# Altium PCB PCB1.PcbDoc
Units mil, origin at the board's own origin, x right, y up, seen from the top; angles counter-clockwise.
Board outline 1095.03 x 730.03 mil, 2 copper layers (Top Layer, Bottom Layer); 11 components, 14 nets, 68 pads, 10 vias.
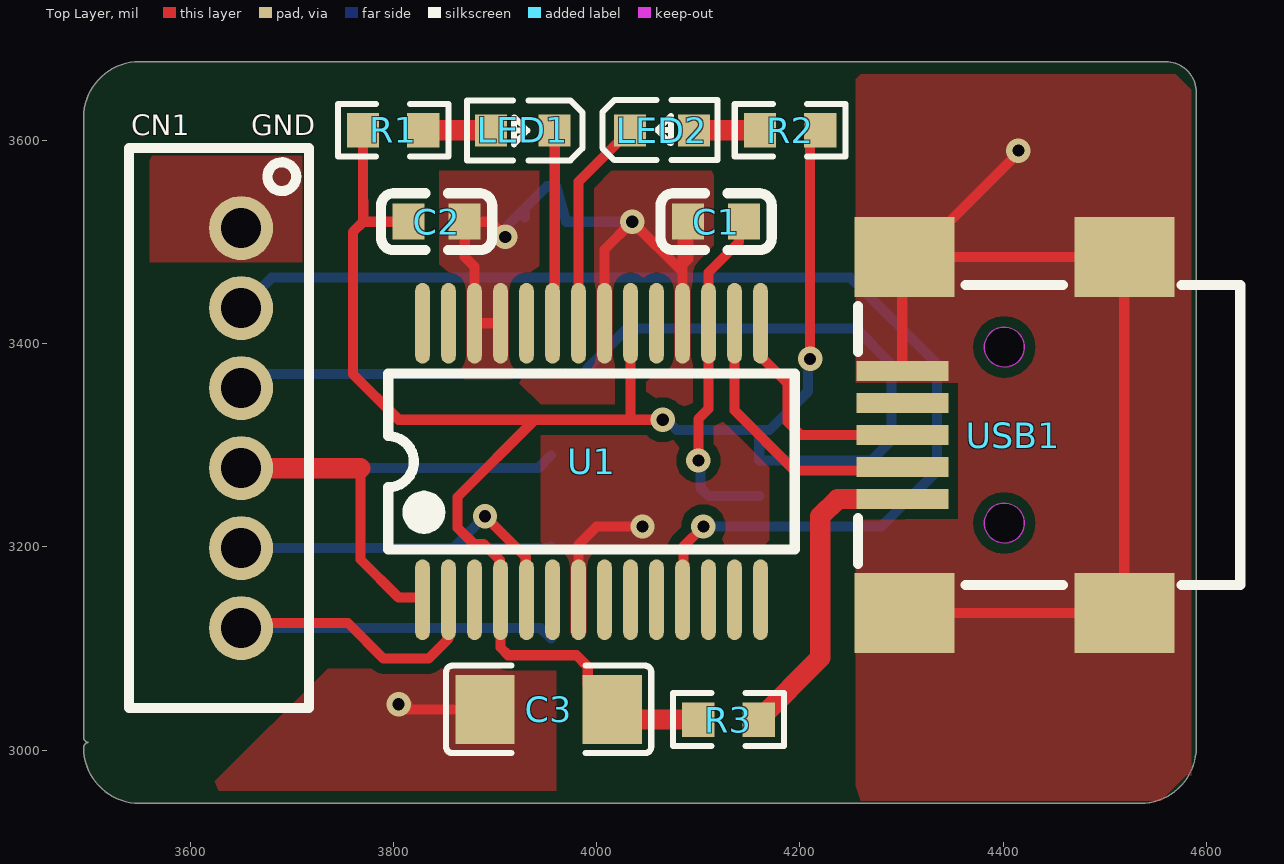
[diagram p0: Top Layer view]
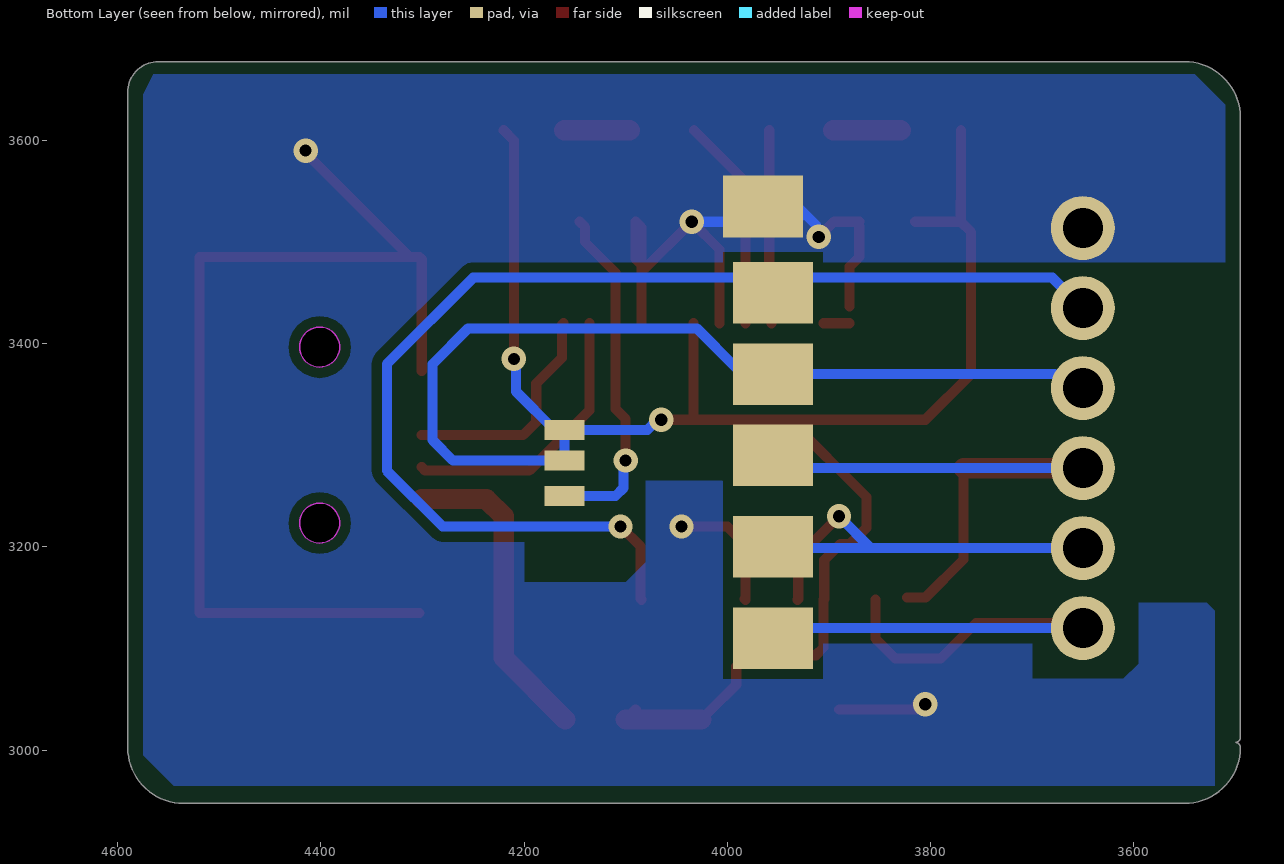
[diagram p1: Bottom Layer view, seen from below]
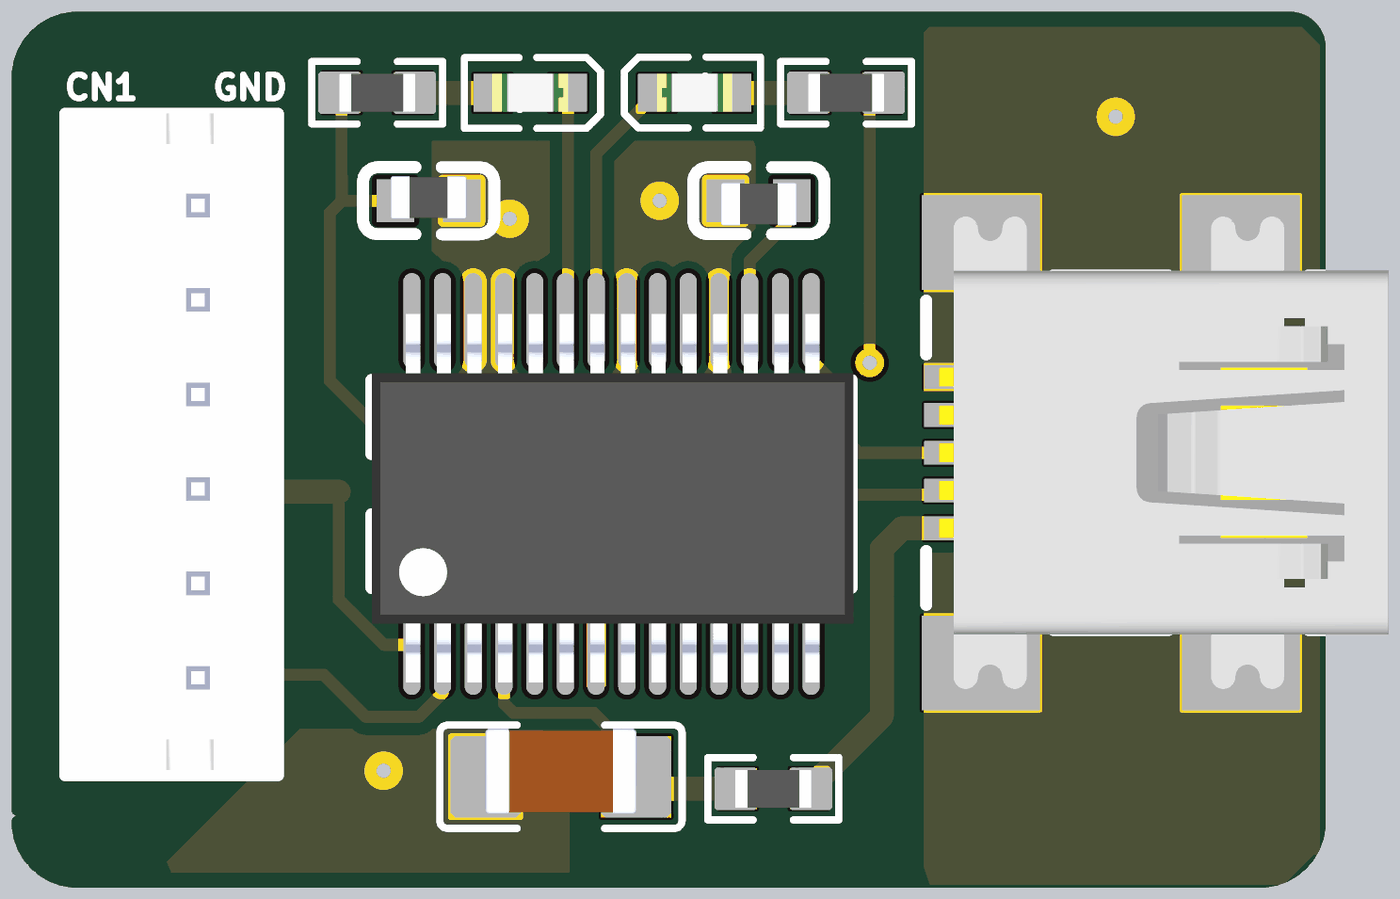
[diagram p2: 3D render of the assembled board from above, using the file's embedded part models]

## Layer stack, top to bottom
Top Solder: solder mask 0.4, Solder Resist, Dk 3.5
Top Layer: signal copper 1.4
Dielectric 1: dielectric 12.6, FR-4, Dk 4.8
Bottom Layer: signal copper 1.4
Bottom Solder: solder mask 0.4, Solder Resist, Dk 3.5

## Board outline
3494.99,3002.5 cw(c3500,3002.5) 3499.61,3007.5 cw(c3500,3012.5) 3494.99,3012.5 3494.99,3622.5 cw(c3550,3622.5) 3550,3677.51 4560,3677.51 cw(c4560,3647.5) 4590.02,3647.5 4590.02,3002.5 cw(c4535,3002.5) 4535,2947.49 3550,2947.49 cw(c3550,3002.5)

## Design rules (kind name [scope] priority, off if disabled: settings)
Clearance [All] p1: gap=10 ignorepadtopadclearanceinfootprint=FALSE
MinimumSolderMaskSliver [All] p1: minsoldermaskwidth=3.15
PolygonConnect [All] p1: connectstyle=Direct reliefconductorwidth=10 reliefentries=4 polygonreliefangle="90 Angle" airgapwidth=10
RoutingVias [All] p1: holewidth=12 width=24 viastyle="Through Hole" minholewidth=10 minwidth=10 maxholewidth=50 maxwidth=50
SilkToSilkClearance [All] p1: silktosilkclearance=3.94
SilkToSolderMaskClearance [IsPad] p1: minsilkscreentomaskgap=1.97 clearancetoexposedcopper=TRUE
SolderMaskExpansion [All] p1: expansion=4 istentingtop=FALSE
SupplyNets "Schematic Supply Nets_3" [InNet('+5V0')] p1: voltage=0.000
SupplyNets "Schematic Supply Nets_2" [InNet('GND')] p2: voltage=0.000
SupplyNets "Schematic Supply Nets" [InNet('+3V3')] p3: voltage=0.000
Width [All] p1: maxlimit=39.37 minlimit=10 preferedwidth=10
27 further rules are at their usual default settings.

## Components (designator, comment, footprint, x,y, rotation, side; value= is the part's Value field where it differs from the comment)
C1 "100nF" C0603 4117.56,3520 r0 top
C2 "100nF" C0603 3842.44,3520 r180 top
C3 "10uF" C1206 3952.7,3040 r0 top
CN1 "B6B-PH-K-S(LF)(SN)" CONN-TH_B6B-PH-K-S 3650,3316.85 r90 top
LED1 "19-217/R6C-AL1M2VY/3T" LED0603-RD 3927.16,3610.01 r180 top
LED2 "19-217/R6C-AL1M2VY/3T" LED0603-RD 4064.2,3609.99 r0 top
R1 "1kΩ" R0603 3799.66,3610 r180 top
R2 "1kΩ" R0603 4190.34,3610 r0 top
R3 "0" R0603 4129.66,3030 r0 top value=1kΩ
U1 "FT232RL-REEL" SSOP-28_L10.2-W5.3-P0.65-LS7.8-BL 3994.84,3283.97 r0 top
USB1 "KH-MINI-SMT-5P-Cu" MINI-USB-SMD_KH-MINI-SMT-5P-CU 4410,3310 r90 top

## Footprints (in the part's own frame and the unit in brackets; to place one, negate y for a bottom-side part, rotate by r counter-clockwise, add the part's x,y. Pads: shape width x height; smd on the part's side, far side on the other; paste and mask are expansions set on the pad)
C0603 [mm]
  rect 0.8x0.9 smd: 1(-0.7,0) 2(0.7,0)
  silkscreen extent -1.39,-0.71 1.39,0.71, body extent -0.8,-0.52 0.8,0.38, height 0.81
C1206 [mm]
  rect 1.485x1.728 smd paste-100 mask+0.051: 1(-1.593,0) 2(1.593,0)
  silkscreen extent -2.56,-1.09 2.56,1.09, body extent -1.6,-0.78 1.6,1.02, height 1.64
CONN-TH_B6B-PH-K-S [mm]
  round 1.6 hole 1: 1(5,0) 2(3,0) 3(1,0) 4(-1,0) 5(-3,0) 6(-5,0)
  silkscreen extent -7,-1.7 7,2.8, body extent -6.89,-1.71 7.01,2.79, height 6
LED0603-RD [mm]
  rect 0.8x0.8 smd paste+0 mask+0.051: 1(-0.799,0) 2(0.799,0)
  silkscreen extent -1.49,-0.75 1.39,0.76, body extent -0.8,-0.4 0.8,0.4, height 0.5
MINI-USB-SMD_KH-MINI-SMT-5P-CU [mm]
  rect 0.5x2.3 smd paste+0 mask+0.05: 1(-1.6,2.775) 2(-0.8,2.775) 3(0,2.775) 4(0.8,2.775) 5(1.6,2.775)
  rect 2x2.5 smd paste+0 mask+0.05: 6(-4.45,-2.775) 7(-4.45,2.725) 8(4.45,-2.775) 9(4.45,2.725)
  Keep-Out Layer board cut-out: 2.7,0.225 2.65,0.008 2.512,-0.166 2.311,-0.263 2.089,-0.263 1.888,-0.166 1.749,0.008 1.7,0.225 1.7,0.225 1.749,0.442 1.888,0.616 2.089,0.712 2.311,0.712 2.512,0.616 2.65,0.442 2.7,0.225
  Keep-Out Layer board cut-out: -1.7,0.225 -1.749,0.008 -1.888,-0.166 -2.089,-0.263 -2.311,-0.263 -2.512,-0.166 -2.65,0.008 -2.7,0.225 -2.7,0.225 -2.65,0.442 -2.512,0.616 -2.311,0.712 -2.089,0.712 -1.888,0.616 -1.749,0.442 -1.7,0.225
  Keep-Out Layer circle w0.025: c2.2,0.225 r0.5
  Keep-Out Layer circle w0.025: c-2.2,0.225 r0.5
  Keep-Out Layer region: 2.7,0.225 2.65,0.008 2.512,-0.166 2.311,-0.263 2.089,-0.263 1.888,-0.166 1.749,0.008 1.7,0.225 1.7,0.225 1.749,0.442 1.888,0.616 2.089,0.712 2.311,0.712 2.512,0.616 2.65,0.442 2.7,0.225
  Keep-Out Layer region: -1.7,0.225 -1.749,0.008 -1.888,-0.166 -2.089,-0.263 -2.311,-0.263 -2.512,-0.166 -2.65,0.008 -2.7,0.225 -2.7,0.225 -2.65,0.442 -2.512,0.616 -2.311,0.712 -2.089,0.712 -1.888,0.616 -1.749,0.442 -1.7,0.225
  silkscreen extent -3.75,-5.67 3.75,3.89, body extent -5,-5.89 5,3.61, height 3.9
R0603 [mil]
  rect 31.75x34.02 smd paste-3937.01 mask+2: 1(-29.66,0) 2(29.66,0)
  silkscreen extent -55,-26 55,26, body extent -31,-16 31,16, height 22
SSOP-28_L10.2-W5.3-P0.65-LS7.8-BL [mil]
  oval 14.33x79.35 smd: 1(-166.34,-136.03) 2(-140.75,-136.03) 3(-115.16,-136.03) 4(-89.57,-136.03) 5(-63.98,-136.03) 6(-38.39,-136.03) 7(-12.79,-136.03) 8(12.8,-136.03) 9(38.39,-136.03) 10(63.98,-136.03) 11(89.57,-136.03) 12(115.16,-136.03) 13(140.75,-136.03) 14(166.34,-136.03) 15(166.34,136.03) 16(140.75,136.03) 17(115.16,136.03) 18(89.57,136.03) 19(63.98,136.03) 20(38.39,136.03) 21(12.8,136.03) 22(-12.79,136.03) 23(-38.39,136.03) 24(-63.98,136.03) 25(-89.57,136.03) 26(-115.16,136.03) 27(-140.75,136.03) 28(-166.34,136.03)
  silkscreen extent -200,-87 200,87, body extent -200,-166 202,142, height 79

## Part data
C1 C2: library part CC0603KRX7R9BB104, JLCPCB Part Class="Basic Part", LCSC Part Name="100nF ±10% 50V", Manufacturer=YAGEO(国巨), Tolerance=±10%, Add into BOM=yes, Convert to PCB=yes, Datasheet=https://atta.szlcsc.com/upload/public/pdf/source/20180910/C282072_33301C7F631E79921B82A8DAC6BCC5B3.pdf, Device=CC0603KRX7R9BB104, Manufacturer Part=CC0603KRX7R9BB104, Supplier=LCSC, Supplier Footprint=0603, Supplier Part=C14663, Symbol=CC0603KRX7R9BB104
C3: library part CL31A106KBHNNNE, JLCPCB Part Class="Basic Part", LCSC Part Name="10uF ±10% 50V", Manufacturer=SAMSUNG(三星), Tolerance=±10%, Add into BOM=yes, Convert to PCB=yes, Datasheet=https://atta.szlcsc.com/upload/public/pdf/source/20160218/1457707763339.pdf, Device=CL31A106KBHNNNE, Manufacturer Part=CL31A106KBHNNNE, Supplier=LCSC, Supplier Footprint=1206, Supplier Part=C13585, Symbol=CL31A106KBHNNNE
CN1: library part B6B-PH-K-S(LF)(SN)_C131342, Colour=White, Current Rating (Max)=2A, Flame Retardant Rating=UL94V-0, JLCPCB Part Class="Extended Part", LCSC Part Name="1x6P 间距:2mm 直插 系列:PH", Manufacturer=JST, Operating Temperature Range=-25℃~+85℃, Rated Voltage (Max)=100V, Add into BOM=yes, Contact Material=Brass, Contact Plating=Tin, Convert to PCB=yes, Datasheet=https://atta.szlcsc.com/upload/public/pdf/source/20171026/C131342_15089839687311058815.pdf, Device=B6B-PH-K-S(LF)(SN)_C131342, Manufacturer Part=B6B-PH-K-S(LF)(SN), Mounting Style=Straight, Number of Pins=6P, Number of PINs Per Row=6, Number of Rows=1, Pins Structure=1x6P, Pitch=2mm, Plastic Material=PA66, Reference Series=PH, Row Spacing=-, Supplementary Features=打K脚, Supplier=LCSC, Supplier Footprint=插件,P=2mm, Supplier Part=C131342, Symbol=B6B-PH-K-S(LF)(SN), X-Length of Bottom Edge on Board (Spacing Line)=13.9mm, Y-Width of Bottom Edge on Board=4.5mm, Z-Height of the Board=6mm
LED1 LED2: Color Temperature=-, Emitted Color=Red, Forward Current=5mA, Forward Voltage (VF)=1.95V, JLCPCB Part Class="Extended Part", LCSC Part Name="红灯 停产 停产", Lens Color="Colorless Transparent Lens", Manufacturer=EVERLIGHT(亿光), Operating Temperature=-40℃~+85℃, Power Dissipation=60mW, Add into BOM=yes, Convert to PCB=yes, Datasheet=https://atta.szlcsc.com/upload/public/pdf/source/20160507/1462613613821.pdf, Device=19-217/R6C-AL1M2VY/3T, Diode Configuration=-, Dominant Wavelength=617.5nm, Manufacturer Part=19-217/R6C-AL1M2VY/3T, Mounting Sytle=-, Peak Wavelength=632nm, Supplier=LCSC, Supplier Footprint=0603, Supplier Part=C72044, Symbol=19-217/R6C-AL1M2VY/3T, Viewing Angle=120°
R1 R2 R3: library part RC0603FR-071KL, JLCPCB Part Class="Extended Part", LCSC Part Name="厚膜电阻 1kΩ ±1% 100mW", Manufacturer=YAGEO(国巨), Operating Temperature=-55℃~+155℃, Power(Watts)=100mW, Temperature Coefficient=±100ppm/℃, Tolerance=±1%, Voltage-Supply(Max)=75V, Add into BOM=yes, Convert to PCB=yes, Datasheet=https://atta.szlcsc.com/upload/public/pdf/source/20180316/70C0E2BDAE7FCC62C531A5A58D202EE1.pdf, Device=RC0603FR-071KL, Manufacturer Part=RC0603FR-071KL, Supplier=LCSC, Supplier Footprint=0603, Supplier Part=C22548, Symbol=RC0603FR-071KL, Type="Thick Film Resistors"
U1: JLCPCB Part Class="Extended Part", LCSC Part Name="FT232R USB UART 芯片", Manufacturer=FTDI(飞特帝亚), Operating Temperature=-40℃~+85℃, Supply Voltage=3.3V~5.25V, Add into BOM=yes, Applications Function="USB to UART", Convert to PCB=yes, Datasheet=https://atta.szlcsc.com/upload/public/pdf/source/20130221/1457706592200.pdf, Device=FT232RL-REEL, Manufacturer Part=FT232RL-REEL, Supplier=LCSC, Supplier Footprint=SSOP-28-208mil, Supplier Part=C8690, Symbol=FT232RL-REEL
USB1: Current Rating - Power (Max)=1A, JLCPCB Part Class="Extended Part", LCSC Part Name="Mini-B 母 卧贴", Manufacturer=kinghelm(金航标), Operating Temperature Range=-, Add into BOM=yes, Connector Type=Mini-B, Contact Material=-, Contact Plating=-, Convert to PCB=yes, Datasheet=https://atta.szlcsc.com/upload/public/pdf/source/20210202/C2688795_BF0BB16DAD2ABFC9845DEEA6AC1A1F9C.pdf, Device=KH-MINI-SMT-5P-Cu, Gender=Female, Manufacturer Part=KH-MINI-SMT-5P-Cu, Mounting Style=卧贴, Number of Contacts=5P, Number of Ports=1, Soldering Temperature(Max)=-, Standard="USB 2.0", Supplier=LCSC, Supplier Footprint=SMD, Supplier Part=C2688795, Symbol=KH-MINI-SMT-5P-CU

## Free pads (board coordinates)
  rect 78.74x60.63 smd far side paste-99999 mask+2: 3(3955,3110) 3(3955,3200) 3(3955,3290) 3(3955,3370) 3(3955,3450) 3(3965,3535)
  rect 39.37x19.68 smd far side paste-3937.01 mask+2: 3(4160,3250) 3(4160,3285) 3(4160,3315)

## Via types
v1: diameter 24.02, hole 12.01, Top Layer to Bottom Layer, 10 vias

## Nets (pads, with @x,y where several pads share a name; then routed paths per layer and width w, separated by ;. In a path a pad name is that pad's centre, name@x,y a point inside that pad or via, vN(x,y) a via of type N, cw(c..) or ccw(c..) an arc to the next point about the centre after c; other vN are vias at no path point)
+3V3: C1.2 pad.3@4160,3250 U1.17 | length 342.8
  Top Layer w10: v1(4100,3285) 4100,3325.82 4110,3335.82 U1.17 4110,3470 4140,3500 4140,3514.88 C1.2
  Bottom Layer w10: v1(4100,3285) 4102.01,3282.99 4102.01,3257.99 4110,3250 pad.3@4160,3250
+5V0: C2.2 C3.2 CN1.3 pad.3@3955,3370 pad.3@4160,3285 pad.3@4160,3315 R1.2 R2.2 R3.1 U1.4 U1.20 | length 2545.2
  Top Layer w10: R1.2 3770,3540.37 3770.09,3540.28 3770.09,3520.09 ; C2.2 3770.18,3520 3770.09,3520.09 ; C3.2@4025.4,3030 C3.2 3991.17,3064.23 3991.17,3082.1 3980,3093.26 3912.86,3093.26 3905.27,3100.86 U1.4 3904.44,3148.77 3904.44,3187.03 3888.55,3202.92 3878.88,3202.92 3862.99,3218.81 3862.99,3249.01 3938.99,3325 ; U1.20 4033.23,3328.23 4030,3325 ; v1(4065,3325) 4030,3325 ; R3.1@4090,3040 R3.1 ; v1(4210,3385) 4210,3600 R2.2 ; 3770.09,3520.09 3760,3510 3760,3370 3805,3325 3938.99,3325 ; 3938.99,3325 4030,3325
  Top Layer w20: C3.2@4025.4,3030 R3.1
  Bottom Layer w10: CN1.3 3664.34,3356.22 3678.12,3370 pad.3@3955,3370 ; pad.3@3990.86,3375.86 4030,3415 4255,3415 4290,3380 4290,3305 4270,3285 4160,3285 pad.3@4160,3315 ; v1(4065,3325) 4068.79,3325 4078.79,3315 pad.3@4160,3315 ; v1(4210,3385) 4207.99,3382.99 4207.99,3352.99 4170,3315 pad.3@4160,3315
CTS: CN1.2 pad.3@3955,3450 U1.11 | length 1171
  Top Layer w10: U1.11 4085.24,3148.77 4085.24,3200.24 v1(4105,3220)
  Bottom Layer w10: CN1.2 3680.04,3465 4250,3465 4335,3380 4335,3275 4280,3220 v1(4105,3220)
DTR: CN1.6 pad.3@3955,3110 U1.2 | length 576.2
  Top Layer w10: CN1.6 3655,3125 3755.14,3125 3790.14,3090 3834.42,3090 3854.09,3109.67 U1.2
  Bottom Layer w10: CN1.6 3945,3120 pad.3@3955,3110
GND: C1.1 C2.1 C3.1 CN1.1 pad.3@3965,3535 U1.7 U1.18 U1.21 U1.25 U1.26 USB1.5 USB1.6 USB1.7 USB1.8 USB1.9 | length 1931.1
  Top Layer w10: v1@3813.79,3045 v1(3805,3045) 3808.79,3045 3813.79,3040 C3.1 ; C2.1@3870,3515.74 3870,3485.32 3879.68,3475.64 U1.26@3879.68,3436.84 ; C2.1 3895,3520 v1(3910,3505) ; U1.26 U1.25 ; U1.7@3982.88,3148.77 U1.7 3982.05,3202.05 4000,3220 v1(4045,3220) ; U1.21 4007.64,3492.64 v1(4035,3520) 4084.41,3470.59 ; U1.18 4084.41,3514.41 C1.1 4090,3483.28 4084.41,3477.69 ; USB1.5 4300.74,3483.23 USB1.9 USB1.9@4312.56,3485.2 ; USB1.7 USB1.6 USB1.8 USB1.9@4312.56,3485.2 ; v1(4415,3590) 4415,3587.64 USB1.9@4312.56,3485.2
  Bottom Layer w10: v1(3910,3505) 3912.68,3507.68 3912.68,3516.74 3950.94,3555 3960,3555 3970,3520 v1(4035,3520) ; pad.3@3929.1,3524.1 pad.3@3929.1,3529.68
NetLED1_2: LED1.2 R1.1 | length 66.4
  Top Layer w20: R1.1 LED1.2
NetLED2_2: LED2.2 R2.1 | length 65
  Top Layer w20: LED2.2 R2.1
NetR3_2: R3.2 USB1.1 | length 312.9
  Top Layer w20: R3.2 4220,3090.68 4220,3230 4237.01,3247.01 USB1.1
RXD: CN1.5 pad.3@3955,3200 U1.5 | length 448.7
  Top Layer w10: v1(3890,3230) 3930.03,3189.97 3930.03,3148.77 U1.5
  Bottom Layer w10: CN1.5 3858.74,3198.74 ; v1(3890,3230) 3858.74,3198.74 ; pad.3@3955,3200 3953.74,3198.74 3858.74,3198.74
RXLED: LED2.1 U1.22 | length 211
  Top Layer w10: U1.22 3982.05,3559.31 LED2.1
TXD: CN1.4 pad.3@3955,3290 U1.1 | length 588.6
  Top Layer w10: 3767.52,3277.48 3767.52,3187.48 3805,3150 U1.1@3822.91,3150
  Top Layer w20: CN1.4 3767.52,3277.48
  Bottom Layer w10: CN1.4 3942.48,3277.48 pad.3@3955,3290
TXLED: LED1.1 U1.23 | length 190.9
  Top Layer w10: U1.23 3956.45,3453.68 3958.63,3455.86 LED1.1
USBDM: U1.16 USB1.2 | length 276.8
  Top Layer w10: U1.16 4135.59,3334.41 4195,3275 4297.24,3275 USB1.2
USBDP: U1.15 USB1.3 | length 226.3
  Top Layer w10: U1.15 4162.59,3418.59 4162.59,3386.08 4187.99,3360.68 4187.99,3322.87 4200.86,3310 USB1.3
pads on no net: U1.3 U1.6 U1.8 U1.9 U1.10 U1.12 U1.13 U1.14 U1.19 U1.24 U1.27 U1.28 USB1.4

## Polygon pours and split planes (outlines as drawn)
GND on Top Layer "NONET_L-01_P-001" (solid, remove dead copper, pour order 9): 3845,3570 4120,3570 4115,3565 4115,3485 4110,3485 4095,3470 4095,3380 4160,3380 4170,3370 4170,3195 4010,3195 3995,3180 3995,3095 3948.17,3095 3946.43,3093.26 3945,3094.7 3945,3340 3920,3365 3845,3365 3845,3575
GND on Top Layer "NONET_L-01_P-001" (solid, pour order 8): 4255,2965 4255,3660 4260,3665 4570,3665 4585,3650 4585,2975 4580,2975 4555,2950 4260,2950
GND on Top Layer "NONET_L-01_P-001" (solid, pour order 7): 3960,2960 3960,3079.7 3946.43,3093.26 3933.17,3080 3735,3080 3615,2960 3610,2960
GND on Top Layer "NONET_L-01_P-001" (solid, pour order 1): 3710,3585 3710,3480 3690,3480 3560,3480 3560,3580 3555,3585
GND on Bottom Layer "NONET_L-01_P-001" (solid, remove dead copper, pour order 10): 3510,3480 3510,3635 3540,3665 4565,3665 4575,3645 4575,3635 4575,2995 4545,2965 3520,2965 3520,3140 3525,3145 3595,3145 3595,3085 3610,3070 3700,3070 3700,3140 3715,3155 3995,3155 3995,3255 4005,3265 4080,3265 4080,3185 4100,3165 4200,3165 4200,3470 4190,3480 3955,3480

## Silkscreen, mask and mechanical layers (free items; w line width, h text height)
Top Overlay:
  text "GND" at 3660,3605 h20
Bottom Paste:
  region: 3915.63,3419.68 3915.63,3480.32 3994.37,3480.32 3994.37,3419.68
  region: 3915.63,3339.68 3915.63,3400.32 3994.37,3400.32 3994.37,3339.68
  region: 3915.63,3169.68 3915.63,3230.32 3994.37,3230.32 3994.37,3169.68
  region: 3915.63,3259.68 3915.63,3320.32 3994.37,3320.32 3994.37,3259.68
  region: 3915.63,3079.68 3915.63,3140.32 3994.37,3140.32 3994.37,3079.68
  region: 3925.63,3504.68 3925.63,3565.32 4004.37,3565.32 4004.37,3504.68
Bottom Solder:
  region: 3915.63,3419.68 3915.63,3480.32 3994.37,3480.32 3994.37,3419.68
  region: 3915.63,3339.68 3915.63,3400.32 3994.37,3400.32 3994.37,3339.68
  region: 3915.63,3169.68 3915.63,3230.32 3994.37,3230.32 3994.37,3169.68
  region: 3915.63,3259.68 3915.63,3320.32 3994.37,3320.32 3994.37,3259.68
  region: 3915.63,3079.68 3915.63,3140.32 3994.37,3140.32 3994.37,3079.68
  region: 3925.63,3504.68 3925.63,3565.32 4004.37,3565.32 4004.37,3504.68
Mechanical 6:
  lines w10: 3500,3000 3500,3602.5 3500,3622.5 cw(c3550,3622.5) 3550,3672.5 4535,3672.5 ; 3560,2952.5 4530,2952.5 ; 3570,3672.5 4535,3672.5 ; 3550,2952.5 cw(c3550,3002.5) 3500,3002.5 ccw(c3550,3002.5) 3550,2952.5 ; 3550,2952.5 4535,2952.5 ccw(c4535,3002.5) 4585,3002.5 4585,3022.5 ; 4535,3672.5 4560,3672.5 cw(c4560,3647.5) 4585,3647.5 ; 4585,3022.5 4585,3647.5 ; 4585,3022.5 4585,3647.5